# Altium PCB PCB_BanTay_v1-copy_2025-10-17.pcbdoc (part 2 of 2)
Units mm, origin at the board's own origin, x right, y up, seen from the top; angles counter-clockwise.
Board outline 141.09 x 106.47 mm, 2 copper layers (Top Layer, Bottom Layer); 135 components, 142 nets, 539 pads, 635 vias.
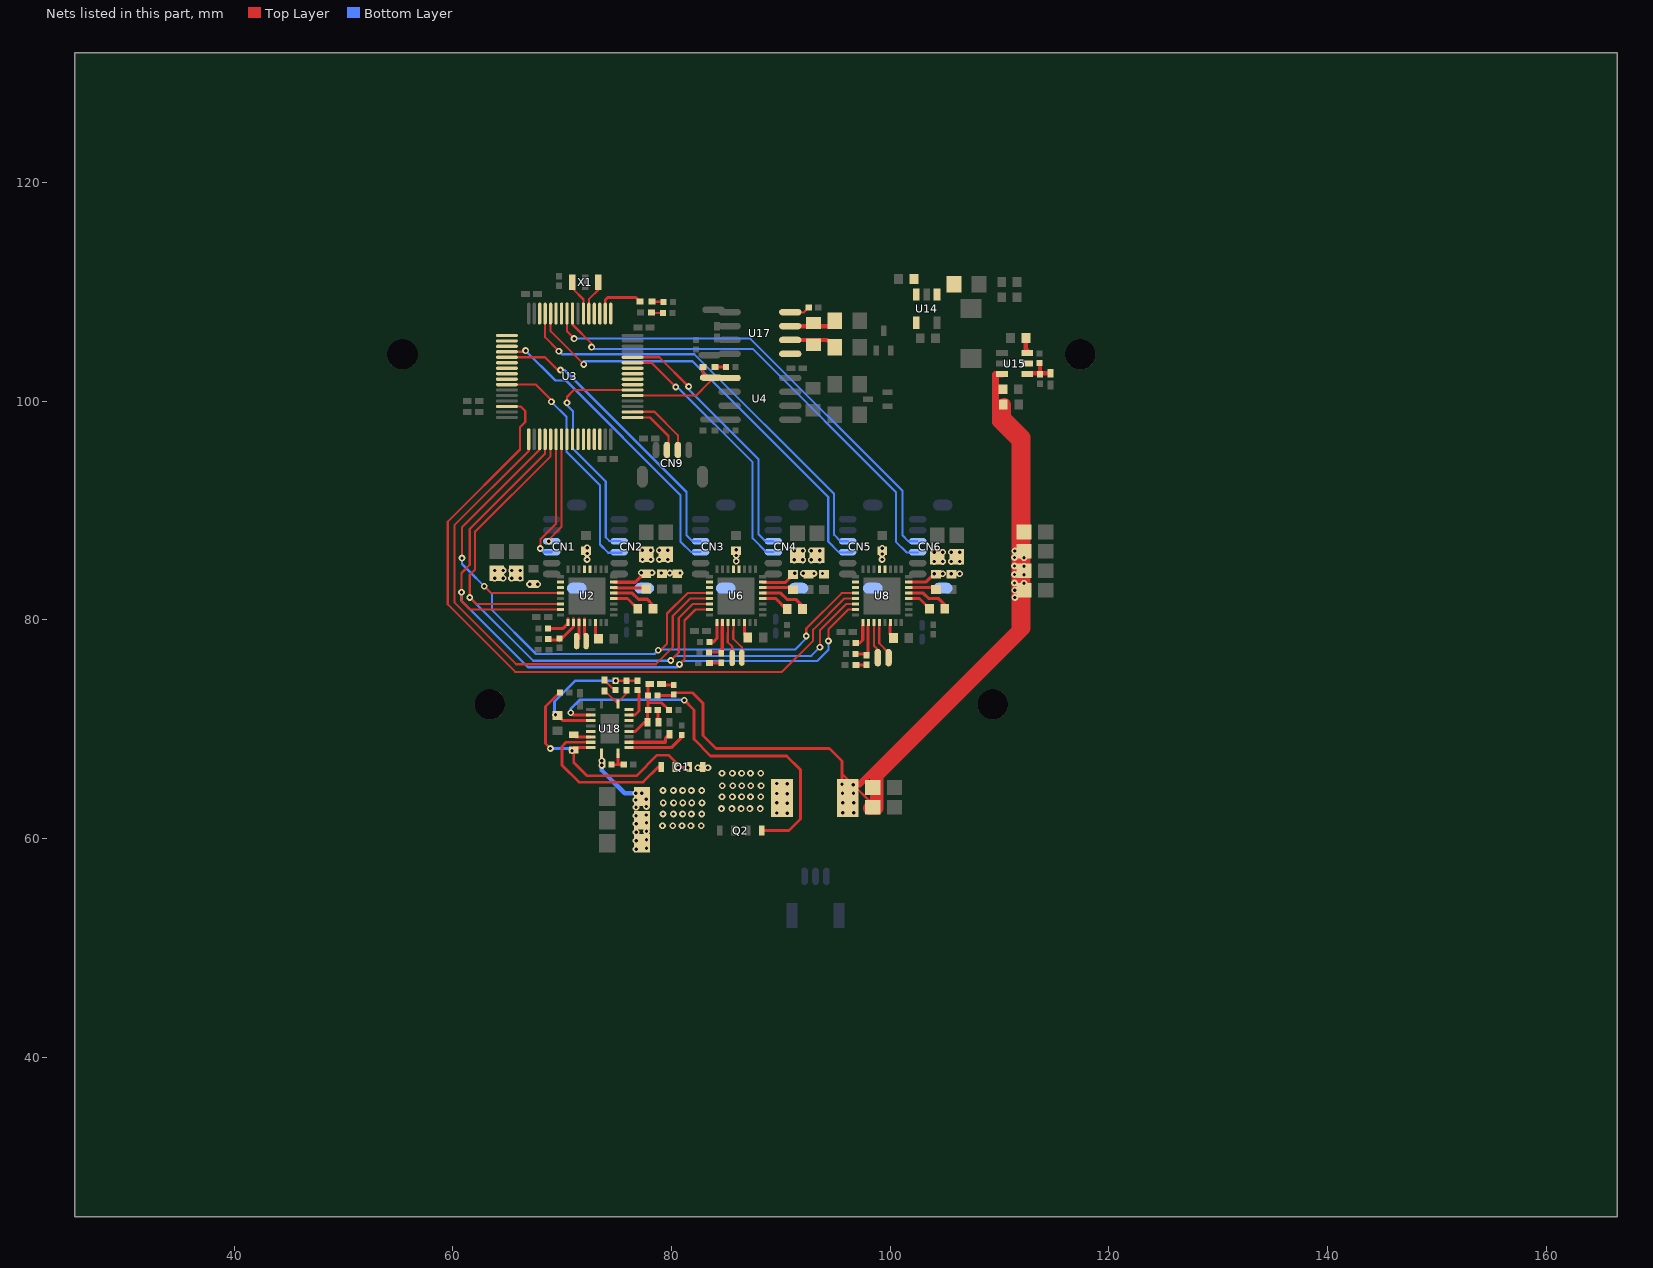
[diagram p2: the nets of this part, all layers, seen from the top]

## Via types
v1: diameter 0.62, hole 0.31, Top Layer to Bottom Layer, tented both sides, 635 vias

## Nets (pads, with @x,y where several pads share a name; then routed paths per layer and width w, separated by ;. In a path a pad name is that pad's centre, name@x,y a point inside that pad or via, vN(x,y) a via of type N, cw(c..) or ccw(c..) an arc to the next point about the centre after c; other vN are vias at no path point) (continued)
R5_1: R5.1 R7.2 U6.2 | length 4.1
  Top Layer w0.28: R5.1@83.422,77.009 84.631,77.035 U6.2@84.631,79.973
R6_2: R6.2 U6.1 | length 2.3
  Top Layer w0.28: R6.2@83.453,77.96 83.81,77.959 84.151,78.3 U6.1@84.151,79.757
R7_1: LED7.1 R7.1 | length 1.1
  Top Layer w0.28: LED7.1@83.448,76.04 84.502,76.04 R7.1@84.54,76.077
R8_1: R8.1 R10.2 U8.2 | length 3.9
  Top Layer w0.28: R8.1@96.813,76.86 97.723,76.86 R10.2@97.83,76.753 97.978,76.753 U8.2@97.978,79.467
R9_2: R9.2 U8.1 | length 2.1
  Top Layer w0.28: R9.2@96.833,77.86 97.181,77.86 97.478,78.157 U8.1@97.478,79.468
R10_1: LED5.1 R10.1 | length 1.9
  Top Layer w0.2: LED5.1@96.878,75.87 R10.1@97.83,75.887
  Top Layer w0.28: LED5.1@96.878,75.87 R10.1@97.83,75.887
R14_1: LED8.2 R14.1 | length 1
  Top Layer w0.254: LED8.2@83.957,103.12 R14.1@84.966,103.11
R22_2: LED1.2 R22.2 | length 1
  Top Layer w0.2: LED1.2@78.198,108.06 R22.2@79.217,108.06
R25_2: R25.2 U18.2 | length 5.4
  Top Layer w0.28: U18.2@76.1,68.301 79.951,68.301 80.92,69.27 R25.2@80.92,69.467
R31_1: R28.2 R31.1 U18.1 | length 2.7
  Top Layer w0.254: R31.1@74.513,66.75 R28.2@75.617,66.75
  Top Layer w0.28: U18.1@75.101,67.799 75.101,66.75 R28.2@75.617,66.75
R32_2: C29.2 L2.1 Q1.1 Q1.2 Q1.3 R32.2 U18.19 | length 23.1
  Top Layer w0.254: v1(68.91,68.23) 68.45,68.69 68.45,72.08 69.73,73.36 R32.2@69.777,73.36 ; C29.2@71.141,68.099 71.049,68.099 C29.2@71.04,68.09 71.04,66.97 72.281,65.729 76.779,65.729 78.669,67.619 79.721,67.619 80.86,66.48 v1(81.46,66.48)
  Top Layer w0.28: C29.2@71.04,68.09 71.04,68.3 U18.19@72.602,68.3
  Bottom Layer w0.254: v1(68.91,68.23) 70.7,68.23 v1(70.89,68.04)
  other v1: 90.57,62.31 89.62,62.33 84.559,62.73 85.51,62.73 86.349,62.73 87.159,62.73 88.11,62.73 90.57,63.23 89.62,63.25 84.609,63.81 85.56,63.81 86.399,63.81 87.209,63.81 88.16,63.81 90.56,64.09 89.61,64.11 84.629,64.824 85.58,64.824 86.419,64.824 87.229,64.824 88.18,64.824 90.56,65.01 89.61,65.03 84.609,65.96 85.559,65.96 86.399,65.96 87.209,65.96 88.16,65.96 80.62,66.46 82.4,66.47 83.32,66.47
R35_1: LED10.1 R35.1 U18.10 | length 3.3
  Top Layer w0.2: LED10.1@73.861,73.43 73.97,73.43 U18.10@75.102,72.3 75.103,72.503 75.88,73.28 R35.1@75.88,73.557
R38_1: C15.1 R38.1 R39.2 U15.4 | length 3.3
  Top Layer w0.4: U15.4@112.389,102.48 112.474,102.565 C15.1@114.65,102.565 ; R39.2@113.65,103.477 113.69,103.437 R38.1@113.69,102.453
R40_1: LED9.2 R40.1 | length 1
  Top Layer w0.254: LED9.2@78.198,109.08 R40.1@79.247,109.08
R42_2: R42.2 U17.8 | length 1.9
  Top Layer w0.2: U17.8@90.852,108.135 90.852,108.105 92.082,108.105 R42.2@92.537,108.56
R46_2: C45.1 R46.2 | length 1.2
  Top Layer w0.28: R46.2@78.733,71.74 78.733,70.625 C45.1@78.8,70.625
R47_2: LED10.2 R47.2 | length 1.7
  Top Layer w0.2: LED10.2@73.861,74.677 73.861,74.459 74.582,73.738 75.05,73.738 R47.2@75.05,73.768
R49_1: C43.1 C44.2 R46.1 R48.2 R49.1 U18.5 | length 7.7
  Top Layer w0.254: 77.835,72.411 79.076,72.411 R48.2@79.747,71.74
  Top Layer w0.28: U18.5@76.1,69.802 76.701,69.801 77.544,70.644 C44.2@77.79,70.645 ; C44.2@77.79,70.645 77.79,71.663 R46.1@77.867,71.74 77.845,71.74 C43.1@77.845,74.04
R50_1: C43.2 R50.1 | length 1.3
  Top Layer w0.28: C43.2@78.935,74.04 80.173,74.04 R50.1@80.19,74.023
R51_1: C59.2 R35.2 R47.1 R51.1 U18.14 | length 13
  Top Layer w0.2: R47.1@74.88,74.603 75.05,74.433 R51.1@76.88,74.433
  Top Layer w0.28: C59.2@69.56,71.25 70.01,70.8 U18.14@72.602,70.8
  Bottom Layer w0.254: v1(69.38,71.3) 69.28,71.3 69.28,72.51 71.203,74.433 v1(74.88,74.433)
R51_2: R51.2 U18.8 | length 3.1
  Top Layer w0.254: U18.8@76.101,71.302 76.652,71.302 77.021,71.67 77.021,73.567 R51.2@76.881,73.567
R64_1: F4.1 R64.1 U17.6 | length 6.6
  Top Layer w0.2: U17.6@90.852,105.595 92.515,105.595 R64.1@92.96,105.15
  Top Layer w0.4: U17.6@90.852,105.595 94.242,105.595 F4.1@94.907,104.93
R64_2: F6.1 R64.2 U17.7 | length 6.5
  Top Layer w0.2: U17.7@90.852,106.865 92.675,106.865 R64.2@92.96,107.15
  Top Layer w0.4: U17.7@90.852,106.865 94.412,106.865 F6.1@94.907,107.36
RO: LED8.1 pad.1@83.6,102.15 U3.53 U4.1 | length 11
  Top Layer w0.2: U3.53@76.43,100.51 82.24,100.509 83.449,101.718 83.846,102.115 U4.1@85.307,102.115
  Top Layer w0.254: LED8.1@82.881,103.12 82.881,102.577 83.31,102.15 pad.1@83.6,102.15
S$104313: 
S$116245: 
S$116265: 
SCK: U2.28 U3.35 U6.28 U8.28 | length 73.2
  Top Layer w0.2: v1(60.82,85.64) 60.82,88.47 67.93,95.58 U3.35@67.93,96.511 ; v1(62.87,83.06) 63.49,82.44 U2.28@69.837,82.44 ; v1(78.77,77.22) 78.989,77.22 79.581,77.809 79.581,80.57 81.451,82.44 U6.28@83.467,82.44 ; v1@92.319,78.52 92.319,79.209 95.55,82.44 U8.28@96.817,82.439
  Bottom Layer w0.2: v1@60.821,85.64 60.821,85.109 63.559,82.371 63.559,80.921 67.6,76.88 78.43,76.88 v1(78.77,77.22) 78.771,77.291 91.311,77.291 92.319,78.3 v1@92.319,78.52
  other v1: 92.32,78.52
SDI: U2.30 U3.37 U6.30 U8.30 | length 74.3
  Top Layer w0.2: U3.37@68.931,96.511 68.931,94.971 62.01,88.05 62.01,84.59 61.54,84.12 v1(61.54,82.04) 62.14,81.44 U2.30@69.837,81.44 ; v1@79.919,76.28 80.65,77.009 80.65,80.159 81.931,81.439 U6.30@83.467,81.44 ; v1@93.559,77.489 93.559,79.021 95.979,81.439 U8.30@96.817,81.439
  Bottom Layer w0.2: v1(61.54,82.04) 67.33,76.25 79.92,76.25 v1(79.92,76.28) 80.339,76.699 92.769,76.699 v1(93.56,77.49)
SDO: U2.31 U3.36 U6.31 U8.31 | length 76.9
  Top Layer w0.2: U3.36@68.43,96.511 68.43,95.211 61.529,88.31 61.529,85.031 60.78,84.281 60.78,82.521 60.78,81.711 61.55,80.941 U2.31@69.838,80.941 ; v1(80.72,75.92) 81.179,76.379 81.179,79.94 82.179,80.939 U6.31@83.467,80.94 ; v1@94.341,78.061 94.341,79.14 96.139,80.939 U8.31@96.817,80.939
  Bottom Layer w0.2: v1@60.78,82.521 60.78,81.739 66.861,75.66 80.46,75.66 v1(80.72,75.92) 81.021,76.219 93.3,76.219 94.341,77.261 v1@94.341,78.061
  other v1: 94.34,78.06 60.78,82.52
SPI2_NSS1: U3.33 U6.29 | length 47.6
  Top Layer w0.2: U3.33@66.929,96.511 66.929,95.439 60.13,88.64 60.13,81.599 65.789,75.94 78.55,75.94 80.109,77.499 80.109,80.349 81.699,81.939 U6.29@83.467,81.94
SPI2_NSS2: U3.30 U8.29 | length 65.7
  Top Layer w0.2: U3.30@64.93,99.511 66.198,99.511 66.609,99.1 66.609,98.089 66.129,97.609 66.129,95.579 59.52,88.97 59.52,81.419 65.7,75.239 90.099,75.239 92.939,78.081 92.939,79.089 95.789,81.939 U8.29@96.817,81.939
SWCLK: CN9.3 U3.50 | length 6.4
  Top Layer w0.2: U3.50@76.429,99.023 78.425,99.023 80.569,96.882 CN9.3@80.569,95.536
SWDIO: CN9.2 U3.49 | length 5.4
  Top Layer w0.2: U3.49@76.429,98.51 78.019,98.51 79.721,96.808 79.721,95.536 CN9.2@79.571,95.536
TIM1_CH1: CN6.3 U3.8 | length 44.2
  Top Layer w0.2: U3.8@70.93,108.01 70.93,107.01 72.68,105.26 v1(72.68,104.94)
  Bottom Layer w0.2: v1(72.68,104.94) 72.68,104.779 87.409,104.779 100.511,91.68 100.511,87.149 101.499,86.161 CN6.3@102.51,86.161
TIM1_CH2: CN6.4 U3.9 | length 44
  Top Layer w0.2: U3.9@70.43,108.01 70.43,106.4 70.94,105.89 70.94,105.86 v1(71.08,105.72)
  Bottom Layer w0.2: v1(71.08,105.72) 87.201,105.719 101.12,91.8 101.12,87.72 101.651,87.19 CN6.4@102.5,87.19
TIM2_CH1: CN5.3 U3.12 | length 40.9
  Top Layer w0.2: U3.12@68.93,108.01 68.93,106.4 v1(71.97,103.36)
  Bottom Layer w0.2: v1@71.969,103.359 71.969,103.641 81.91,103.641 94.321,91.231 94.321,87.159 95.334,86.146 96.551,86.146 CN5.3@96.1,86.19
TIM2_CH2: CN5.4 U3.13 | length 39.8
  Top Layer w0.2: U3.13@68.43,108.01 68.43,105.83 69.6,104.66 69.69,104.57 v1(69.69,104.56)
  Bottom Layer w0.2: v1@69.69,104.561 69.96,104.289 82.08,104.289 94.859,91.51 94.859,87.769 95.441,87.19 CN5.4@96.1,87.19
TIM3_CH1: CN3.3 U3.20 | length 27.9
  Top Layer w0.2: U3.20@64.93,104.51 66.53,104.51 v1(66.64,104.62)
  Bottom Layer w0.2: v1(66.64,104.62) 69.378,101.881 70.33,101.881 80.8,91.411 80.8,87.169 81.781,86.189 CN3.3@82.647,86.19
TIM3_CH2: CN3.4 U3.21 | length 27
  Top Layer w0.2: U3.21@64.93,104.01 68.41,104.01 69.57,102.85 v1(69.83,102.85)
  Bottom Layer w0.2: v1@69.83,102.851 70.201,102.851 81.359,91.693 81.359,87.731 81.9,87.19 CN3.4@82.647,87.19
TIM4_CH1: CN4.3 U3.59 | length 24.1
  Top Layer w0.2: U3.59@76.43,103.51 78.16,103.51 v1(80.38,101.29)
  Bottom Layer w0.2: v1@80.379,101.289 80.518,101.289 87.409,94.398 87.409,87.449 88.669,86.189 CN4.3@89.3,86.19
TIM4_CH2: CN4.4 U3.60 | length 24
  Top Layer w0.2: U3.60@76.43,104.01 78.88,104.01 v1(81.55,101.34)
  Bottom Layer w0.2: v1(81.55,101.34) 81.55,101.091 87.93,94.71 87.93,87.84 88.58,87.19 CN4.4@89.3,87.19
TIM5_CH1: CN2.3 U3.26 | length 22
  Top Layer w0.2: U3.26@64.93,101.51 67.6,101.51 68.999,100.11 v1@68.999,99.94
  Bottom Layer w0.2: v1@68.999,99.94 70.381,98.561 70.381,95.361 73.439,92.303 73.439,86.88 74.191,86.13 CN2.3@75.41,86.13
  other v1: 69,99.94
TIM5_CH2: CN2.4 U3.54 | length 22
  Top Layer w0.2: v1(70.43,99.85) 70.429,100.38 71.059,101.01 U3.54@76.43,101.01
  Bottom Layer w0.2: v1(70.43,99.85) 70.429,99.63 70.981,99.079 70.981,95.648 73.98,92.648 73.98,87.54 74.3,87.22 CN2.4@75.309,87.22
TIM8_CH1: CN1.3 U3.38 | length 11.8
  Top Layer w0.2: v1(67.99,86.52) 67.991,87.339 69.431,88.782 U3.38@69.431,96.511
  Bottom Layer w0.28: v1(67.99,86.52) 68.321,86.189 CN1.3@69.023,86.19
TIM8_CH2: CN1.4 U3.39 | length 9.8
  Top Layer w0.2: v1(68.75,87.18) 68.751,87.329 69.929,88.51 U3.39@69.929,96.511
U2_1: R4.2 U2.1 | length 2.5
  Top Layer w0.28: R4.2@68.683,79.19 70.031,79.189 70.529,79.689 70.529,80.103
U2_2: R3.2 R43.1 U2.2 | length 3.6
  Top Layer w0.28: R43.1@68.713,78.15 69.487,78.15 R3.2@69.71,78.373 ; R3.2@69.741,78.084 71.029,79.371 71.029,80.103
U2_3: pad.4@71.31,78.05 U2.3 | length 2.2
  Top Layer w0.254: pad.4@71.31,78.05 71.326,78.05 71.528,78.252 71.528,80.104
U2_4: pad.3 U2.4 | length 2.1
  Top Layer w0.254: 72.028,80.104 72.028,78.722 72.17,78.58 pad.3@72.17,78.05
U2_6: U1.1 U2.6 | length 1.5
  Top Layer w0.28: U2.6@73.02,79.637 73.02,78.54 U1.1@73.3,78.26
U2_12: C21.2 U2.12 | length 2.6
  Top Layer w0.28: U2.12@74.702,81.94 75.97,81.94 C21.2@76.9,81.01
U2_13: C21.1 U2.13 | length 4.4
  Top Layer w0.28: U2.13@74.702,82.44 76.41,82.44 76.97,81.88 77.77,81.88 78.3,81.35 C21.1@78.3,81.01
U2_14: C19.1 U2.14 | length 3
  Top Layer w0.28: U2.14@74.672,82.92 77.49,82.92 77.56,82.92 C19.1@77.65,82.83
U3_1: U3.1
U3_2: LED9.1 U3.2 | length 4.7
  Top Layer w0.254: U3.2@73.93,108.01 73.93,109.249 74.151,109.47 76.752,109.47 LED9.1@77.122,109.1
U3_3: U3.3
U3_4: U3.4
U3_5: U3.5 X1.3 | length 3.2
  Top Layer w0.2: U3.5@72.43,108.01 72.431,109.31 73.348,110.23 X1.3@73.348,110.819
U3_6: U3.6 X1.1 | length 3.2
  Top Layer w0.2: X1.1@70.95,110.819 70.95,110.278 71.931,109.3 U3.6@71.93,108.01
U3_10: U3.10
U3_11: U3.11
U3_14: U3.14
U3_17: U3.17
U3_18: U3.18
U3_19: U3.19
U3_22: U3.22
U3_23: U3.23
U3_24: U3.24
U3_25: U3.25
U3_40: U3.40
U3_41: U3.41
U3_42: U3.42
U3_43: U3.43
U3_44: U3.44
U3_45: U3.45
U3_46: U3.46
U3_55: U3.55
U3_56: U3.56
U3_57: U3.57
U3_58: U3.58
U5_1: U5.1 U6.6 | length 1.5
  Top Layer w0.28: U6.6@86.65,79.757 86.65,78.69 U5.1@86.97,78.37
U6_3: pad.7 U6.3 | length 3.4
  Top Layer w0.2: U6.3@85.15,79.757 85.139,77.952 85.54,77.55 pad.7@85.54,76.51
U6_4: pad.6 U6.4 | length 3.6
  Top Layer w0.2: U6.4@85.65,79.757 85.639,78.272 86.421,77.489 pad.6@86.42,76.53
U6_12: C49.2 U6.12 | length 2.6
  Top Layer w0.28: U6.12@88.331,81.939 89.52,81.939 C49.2@90.49,80.969
U6_13: C49.1 U6.13 | length 4.4
  Top Layer w0.28: U6.13@88.331,82.44 89.987,82.44 90.556,81.871 91.359,81.871 91.89,81.34 C49.1@91.89,80.969
U6_14: C10.1 U6.14 | length 3
  Top Layer w0.28: U6.14@88.222,82.96 90.94,82.96 C10.1@91.13,82.77
U7_1: U7.1 U8.6 | length 1.4
  Top Layer w0.28: U8.6@99.99,79.627 99.99,78.65 U7.1@100.29,78.35
U8_3: pad.8 U8.3 | length 3.4
  Top Layer w0.2: U8.3@98.499,79.757 98.499,77.652 98.86,77.291 pad.8@98.86,76.53
U8_4: pad.9 U8.4 | length 3.6
  Top Layer w0.2: U8.4@98.989,79.747 98.989,77.85 99.84,76.999 pad.9@99.84,76.54
U8_12: C22.2 U8.12 | length 2.4
  Top Layer w0.28: U8.12@101.682,81.939 102.67,81.939 C22.2@103.681,80.931
U8_13: C22.1 U8.13 | length 4.2
  Top Layer w0.28: U8.13@101.682,82.44 103.02,82.44 103.531,81.929 104.44,81.929 105.08,81.289 C22.1@105.08,80.931
U8_14: C23.1 U8.14 | length 2.6
  Top Layer w0.28: U8.14@101.601,82.96 104.09,82.96 C23.1@104.19,82.86
U14_1: C12.2 F1.2 U14.1 U14.3
U14_4: U14.4
U15_5: U15.5
U15_6: C8.2 U15.6 | length 1.4
  Top Layer w0.4: C8.2@112.4,105.79 112.4,104.76 112.519,104.641 U15.6@112.519,104.39
U17_5: U17.5
U18_3: C42.2 U18.3 | length 4.2
  Top Layer w0.28: U18.3@76.101,68.802 79.426,68.802 79.426,69.161 C42.2@79.79,69.525
U18_7: U18.7
U18_9: U18.9
U18_13: Q2.4 U18.13 | length 36.3
  Top Layer w0.254: v1@81.151,72.651 82.04,71.759 82.04,69.079 83.569,67.55 90.521,67.55 91.791,66.28 91.791,61.782 90.734,60.725 Q2.4@88.225,60.725
  Top Layer w0.28: v1(70.78,71.5) 70.978,71.301 U18.13@72.599,71.301
  Bottom Layer w0.254: v1(70.78,71.5) 70.78,71.871 71.59,72.681 80.899,72.681 80.93,72.651 v1@81.151,72.651
  other v1: 81.15,72.65
U18_16: U18.16
U18_17: C29.1 U18.17 | length 1.6
  Top Layer w0.28: C29.1@71.04,69.49 71.23,69.3 U18.17@72.602,69.3
U18_18: Q1.4 U18.18 | length 14.8
  Top Layer w0.254: U18.18@72.602,68.8 70.351,68.8 69.97,68.419 69.97,66.699 71.519,65.15 77.379,65.15 78.773,66.544 Q1.4@79.055,66.545
VIN: C14.2 C56.2 C57.2 R31.2 U18.20 | length 6.5
  Top Layer w0.28: U18.20@73.6,67.799 73.6,67.2 73.647,67.153 R31.2@73.647,66.75
  Bottom Layer w0.4: v1@73.62,67.111 v1(73.62,66.68) 73.62,66.219 75.71,64.129 v1(76.71,64.13) v1(77.27,64.15)
  other v1: 76.75,59.01 77.7,59.09 76.75,59.787 77.7,59.867 76.75,60.563 77.7,60.644 79.16,61.16 80.11,61.16 80.95,61.16 81.76,61.16 82.71,61.16 76.75,61.34 77.7,61.42 76.74,62.07 77.69,62.15 79.21,62.24 80.16,62.24 81,62.24 81.81,62.24 82.76,62.24 76.74,62.847 77.69,62.927 79.23,63.253 80.18,63.253 81.02,63.253 81.83,63.253 82.78,63.253 76.719,63.52 77.67,63.6 79.21,64.39 80.16,64.39 81,64.39 81.81,64.39 82.76,64.39 73.62,67.11
VOUT: C4.2 C5.1 C6.2 C9.2 C10.2 C13.2 C18.2 C19.2 C23.2 C24.2 C26.1 C30.2 C31.2 C32.2 C33.2 C34.2 C35.2 C36.2 C37.2 C38.2 C39.2 C40.2 C41.1 C46.2 C50.2 C51.1 C52.2 C58.1 CN1.8 CN2.8 CN3.8 CN4.8 CN5.8 CN6.8 L2.2 R49.2 R50.2 U2.15 U2.20 U2.21 U2.26 U2.27 U6.15 U6.20 U6.21 U6.26 U6.27 U8.15 U8.20 U8.21 U8.26 U8.27 U15.3 | length 132.6
  Top Layer w0.2: 95.63,66.11 95.63,65.88 v1(96.61,64.9) 98.09,63.42 C58.1@98.09,62.76
  Top Layer w0.254: R50.2@80.19,73.157 80.19,73.321 81.931,73.321 82.881,72.371 82.881,69.41 84.059,68.231 94.439,68.231 95.58,67.09 v1(95.58,64.95)
  Top Layer w0.28: R49.2@78.703,73.07 80.103,73.07 R50.2@80.19,73.157 ; U6.15@88.332,83.44 88.372,83.4 90.36,83.4 C10.2@91.13,84.17 ; U8.15@101.682,83.439 103.229,83.439 103.999,84.209 v1(104.011,84.209)
  Top Layer w0.3: U2.15@74.702,83.44 76.67,83.44 77.46,84.23 C19.2@77.651,84.23
  Top Layer w0.6: L2.2@96.109,63.7 96.109,64.421 v1(95.58,64.95) 97.181,64.949 111.4,79.171 111.4,82.043 111.4,96.22 109.62,98.007 109.62,102.478 U15.3@110.221,102.478
  Top Layer w1.2: C58.1@98.09,62.76 98.761,62.76 98.761,65.742 112.24,79.219 112.24,96.709 110.419,98.531 110.419,99.699 110.419,98.36 111.631,97.149 111.631,96.369
  other v1: 95.635,62.36 96.64,62.36 95.635,63.28 96.64,63.28 95.625,64.14 96.63,64.14 111.4,82.043 111.4,82.696 67.01,83.26 67.74,83.26 112.23,83.34 111.36,83.37 63.81,83.79 64.587,83.79 65.363,83.79 66.14,83.79 112.23,84.117 111.36,84.146 104.786,84.21 105.563,84.21 106.34,84.21 93.023,84.23 93.8,84.23 91.263,84.24 92.04,84.24 79.053,84.28 79.83,84.28 80.76,84.28 77.213,84.3 78.203,84.31 63.83,84.51 64.606,84.51 65.383,84.51 66.16,84.51 112.23,84.893 111.36,84.923 104.026,85.33 104.803,85.33 105.58,85.33 106.356,85.33 85.9,85.37 91.22,85.48 91.996,85.48 92.773,85.48 93.55,85.48 72.27,85.52 77.33,85.51 78.107,85.51 78.883,85.51 79.66,85.51 99.251,85.51 112.23,85.67 111.36,85.7 85.9,85.88 99.251,86.02 72.266,86.068 104.026,86.17 104.803,86.17 105.58,86.17 106.356,86.17 111.4,86.29 91.22,86.32 91.996,86.32 92.773,86.32 93.55,86.32 77.33,86.35 78.107,86.35 78.883,86.35 79.66,86.35 85.91,86.4 99.261,86.54 72.266,86.598
copper on no net: | length 0

## Polygon pours and split planes (outlines as drawn)
+3.3V on Mid-Layer 2 (solid): 52.95,114.82 54.48,113.29 120.51,113.29 121.02,112.78 121.02,69.35 98.54,46.74 98.54,40.78 93.08,46.24 69.97,46.24 49.65,66.56 49.65,95.64
GND on Mid-Layer 1 (solid): 50.2,119.17 116.05,119.17 129.84,105.38 129.84,86.7 112.24,69.1 112.24,41.7 110.42,43.52 58.54,43.52 44.93,57.13 44.93,117.54
VIN on Bottom Layer (solid): 83.96,62.54 83.01,57.94 82.79,55.01 81.37,53.3 77.99,53.28 76.36,55.82 76.38,58.97 76.38,64.27 76.69,64.58 78.52,64.58 79.13,65.09 83.88,65.12
VOUT on Bottom Layer (solid): 65.47,85.19 69.94,85.22 71.2,86.89 80.14,86.78 90.29,86.79 97.4,86.81 106.65,86.79 107.42,87.61 111.31,87.61 112.5,86.4 112.5,86.29 112.42,86.19 112.42,84.54 112.42,81.97 110.66,80.67 66.02,80.67 63.02,83.72 63.06,85.19
GND on Bottom Layer (solid): 52.555,116.27 53.285,117 153.795,117 147.255,110.46 139.645,110.46 128.395,99.21 128.395,50.41 120.775,42.79 69.065,42.79 47.295,64.56 47.295,101.57
DRV1_OUT1 on Top Layer (solid): 68.19,85.34 68.42,85.56 68.66,85.69 68.99,85.78 70.1,85.78 71,85.77 71.39,85.65 71.66,85.37 71.67,84.76 71.34,84.75 71.35,84.98 71.22,85.18 70.89,85.26 70.3,85.18 70,85.03 69.73,84.78 68.51,84.78 68.18,85.05
DRV1_OUT0 on Top Layer (solid): 69.46,83.77 69.08,83.89 68.24,83.89 68.12,84.27 68.32,84.53 68.73,84.57 69.13,84.56 70.02,84.54 70.19,84.23 70.19,83.77 69.46,83.77
VOUT on Top Layer (solid): 74.32,83.57 75.27,83.56 75.62,84.16 75.62,84.64 76.12,85.68 77.19,86.73 80.19,86.69 81.87,84.98 81.04,83.77 80.17,83.78 78.13,83.83 77.32,83.84 76.85,83.24 74.38,83.23 74.17,83.44
VOUT on Top Layer (solid): 70.21,83.55 69.53,83.55 69.34,83.55 69.02,83.87 67.9,83.87 67.88,83.89 66.96,84.05 66.43,84.95 63.32,84.96 63.32,83.44 64.85,82.91 70.18,82.78 70.2,82.76
DRV3_OUT0 on Top Layer (solid): 97.12,83.79 96.13,83.79 95.79,83.8 95.53,83.85 95.32,83.96 95.24,84.23 95.4,84.57 95.69,84.63 96.1,84.65 96.67,84.63 97.16,84.31 97.12,83.79
DRV3_OUT1 on Top Layer (solid): 95.415,85.555 96.05,85.7 97.2,85.89 97.97,85.91 98.41,85.71 98.65,85.31 98.69,84.26 98.34,84.26 98.34,84.96 98.08,85.16 97.34,85.16 96.93,84.85 95.415,84.855 95.365,84.905 95.365,85.055 95.215,85.205
VOUT on Top Layer (solid): 97.18,83.6 95.94,83.58 95.22,84.11 94.01,85.65 92.95,85.67 92.91,84.73 92.9,84.15 94.7,82.81 97.15,82.77
VOUT on Top Layer (solid): 101.33,83.6 102.2,83.59 102.78,83.7 103.25,83.81 103.56,84.32 103.615,85.435 103.64,86.47 106.77,86.45 106.755,85.155 106.43,83.26 103.72,83.29 103.42,83.27 101.31,83.26 101.28,83.46
DRV2_OUT0 on Top Layer (solid): 83.61,84.55 83.83,84.38 83.83,83.81 83.12,83.78 82.06,83.84 82.13,84.5 82.33,84.59 82.67,84.63 83.27,84.61
DRV2_OUT1 on Top Layer (solid): 81.87,85.46 82.17,85.64 82.62,85.74 83.45,85.86 84.24,85.87 85.12,85.79 85.37,85.38 85.37,84.62 84.985,84.67 84.63,85.17 84.01,85.18 83.28,84.82 82.34,84.82 81.96,84.83 81.79,85.11
VOUT on Top Layer (solid): 83.86,83.51 83.18,83.51 82.99,83.51 82.825,83.925 81.415,85.465 79.495,85.455 79.505,84.225 80.055,83.825 81.87,82.74 83.83,82.74 83.85,82.72
VOUT on Top Layer (solid): 88.01,83.59 88.96,83.58 89.61,83.79 90.27,84.13 90.69,85.1 90.71,86.67 93.96,86.61 94.04,85.61 94.54,84.96 93.46,83.9 92.1,83.89 91.08,83.88 90.54,83.26 88.07,83.25 87.86,83.46
DRV1_OUT2 on Top Layer (solid): 75.83,85.71 75.35,85.77 74.37,85.79 73.69,85.82 73.14,85.81 72.93,85.62 72.89,85.32 72.87,84.97 72.91,84.665 73.19,84.645 73.21,84.99 73.39,85.14 74.25,85.13 74.47,84.85 75.54,84.83 75.91,84.86 76.12,85.07 76.13,85.41
DRV1_OUT3 on Top Layer (solid): 74.49,84.55 74.36,84.31 74.36,83.81 75.01,83.8 75.3,83.81 76,83.85 76.09,84.17 76.04,84.53 75.65,84.63 74.97,84.64
DRV2_OUT2 on Top Layer (solid): 89.83,85.66 88.8,85.68 88.19,85.74 87.49,85.8 86.79,85.75 86.54,85.52 86.49,85.21 86.48,85 86.47,84.24 86.79,84.26 86.83,84.97 87.17,85.14 87.94,85.14 88.22,84.855 89.91,84.855 90.04,84.915 90.16,85.195 90.11,85.42
DRV2_OUT3 on Top Layer (solid): 88.21,84.45 87.96,84.14 87.95,83.75 88.6,83.74 88.89,83.75 89.48,83.8 90.03,83.91 90.16,84.12 90.11,84.47 89.86,84.63 89.52,84.66 89.13,84.66 88.71,84.67
DRV3_OUT2 on Top Layer (solid): 103.25,85.53 103,85.71 101.59,85.78 100.58,85.78 100.18,85.73 99.88,85.48 99.85,85.14 99.84,84.26 100.18,84.27 100.18,84.95 100.42,85.11 101.29,85.1 101.7,84.83 103.14,84.84 103.19,84.89 103.19,84.9 103.35,85.06
DRV3_OUT3 on Top Layer (solid): 101.87,84.7 101.81,84.7 101.33,84.26 101.32,83.76 102.04,83.76 102.59,83.84 103.22,83.86 103.32,84.2 103.27,84.48 103.07,84.7
U14_1 on Top Layer (solid): 101.61,111.7 102.03,112.04 105.9,112.06 105.98,111.36 105.92,109.65 105.43,109.18 102.06,109.19 101.83,109.6 101.64,110.64
+3.3V on Top Layer (solid): 65.85,100.64 62.28,100.64 62.13,100.49 62.13,98.48 62.28,98.33 65.92,98.33 65.89,98.36 65.89,100.65
+3.3V on Top Layer (solid): 75.66,105.85 75.67,105.86 77.3,105.86 77.35,105.91 77.35,107.22 77.27,107.3 75.77,107.3 75.43,106.96 75.43,105.96
+3.3V on Top Layer (solid): 103.63,107.8 103.58,107.75 103.58,105.12 103.71,104.99 104.95,104.99 105.09,105.13 105.09,107.26 104.48,107.87 104.15,107.87
+5V on Top Layer (solid): 107.97,111.725 107.97,109.675 107.68,109.385 106.75,109.385 106.81,109.325 106.81,107.665 107.09,107.385 110.27,107.385 110.73,107.845 110.73,111.705 110.56,111.875 108.31,111.875
L1_1 on Top Layer (solid): 111.07,106.23 106.8,106.23 106.18,105.61 106.18,103.31 106.52,102.97 109.51,102.97 109.71,103.17 110.72,103.17 110.75,103.2 110.75,103.68 109.58,103.68 109.57,103.69 109.57,103.76 109.24,104.09 109.24,104.63 109.66,105.05 111.17,105.05 111.2,105.08
R32_2 on Top Layer (solid): 80.05,66.14 80.69,65.5 83.26,65.5 84.09,64.67 84.09,62.31 84.22,62.16 89.84,62.16 90.82,63.14 91.15,63.14 90.21,64.08 90.21,66.64 89.9,66.95 84.17,66.95 84.15,66.93 81.82,66.93 81.74,67.01 80.08,67.01
VIN on Top Layer (solid): 76.43,64.59 78.59,64.59 78.9,64.9 83.11,64.9 83.43,64.58 83.43,59.93 83.01,57.97 81.67,56.61 81.6,56.54 78.68,56.54 76.28,58.94 76.28,64.59
+3.3V on Top Layer (solid): 67.03,110.09 67.04,110.08 67.04,107.23 66.14,108.13 66.14,110.07
+3.3V on Top Layer (solid): 97.16,80.28 97.15,80.02 96.46,80.02 95.92,79.48 95.92,78.56 95.41,78.05 95.41,77.37 95.67,77.11 96.2,77.11 96.3,77.01 96.3,75.61 96.19,75.49 95.95,75.49 95.92,75.52 95.37,75.52 95,75.89 95,79.22 96.43,80.65 97.16,80.65
+3.3V on Top Layer (solid): 74.32,97.1 75.41,96.01 75.41,94.44 75.26,94.29 74.36,94.29 74.28,94.37 74.28,94.93
VOUT on Top Layer (solid): 95.16,64.86 95.19,64.89 95.24,66.775 96.72,66.755 98.71,67.45 100.9,68.99 103.31,69.79 101.13,67.33 98.94,64.89 98.94,62.2 98.33,61.93 96.25,61.91 95.1,61.98
+3.3V on Top Layer (solid): 83.82,80.27 83.79,80.24 82.73,80.24 82.48,79.99 82.48,78.59 82.12,78.23 82.12,77.67 82.12,77.36 82.72,76.76 82.72,75.72 82.71,75.73 82.01,75.73 81.62,76.12 81.62,80.14 82.08,80.6 83.78,80.6
GND on Top Layer (solid): 55.88,114.3 136.53,114.3 142.75,108.08 142.75,101.47 139.95,104.27 139.95,105.66 118.87,84.58 118.87,48.77 108.2,38.1 67.06,38.1 38.1,67.06 38.1,110.11

## Keep-outs
Keep-Out Layer:
  lines w0.254: 53.705,107.273 ccw(c53.705,106.273) 52.708,106.196 ccw(c169.862,115.203) 61.453,69.887 ccw(c62.375,70.273) 62.375,69.273 ; 56.378,107.273 ccw(c56.378,108.273) 57.378,108.273 ; 57.378,111.273 cw(c58.378,111.273) 58.378,112.273 ; 110.381,69.273 ccw(c110.381,70.273) 111.304,69.887 ccw(c2.894,115.203) 120.048,106.196 ccw(c119.051,106.273) 119.051,107.273 ; 114.378,112.273 cw(c114.378,111.273) 115.378,111.273 ; 115.378,108.273 ccw(c116.378,108.273) 116.378,107.273

## Other copper
Top Layer:
  rectangle net VOUT: 71.91,84.82 72.65,86.46
  rectangle net VOUT: 98.847,84.41 99.637,86.33
  rectangle net VOUT: 85.51,84.78 86.27,86.7
  rectangle net GND: 67.25,78.92 68.1,80.53
  rectangle net DE: 84.8,99.59 86.01,100.96
  rectangle net VOUT: 109.61,98.59 110.79,102.73
  rectangle net +3.3V: 68.35,79.99 70.17,80.59
  rectangle net +3.3V: 67.4,76.98 68.065,78.581
  rectangle net +3.3V: 82.1,75.67 82.75,77.34
  rectangle net U18_17: 70.59,69.49 71.47,69.97
  rectangle net R32_2: 70.59,67.63 71.49,67.96

## Silkscreen, mask and mechanical layers (free items; w line width, h text height)
Top Solder:
  rectangle net U18_17: 70.539,69.439 71.521,70.021
  rectangle net R32_2: 70.539,67.579 71.541,68.011
Document:
  lines w0.254: 68.378,65.773 74.878,65.773 cw(c74.878,63.773) 76.878,63.773 76.878,51.773 ; 95.878,51.773 95.878,63.773 ; 95.89,63.76 cw(c97.89,63.76) 97.89,65.76 ; 97.878,65.773 104.378,65.773